# EAGLE board ProPinEZMachBAutoRouteV2c (EAGLE 7.1.0)
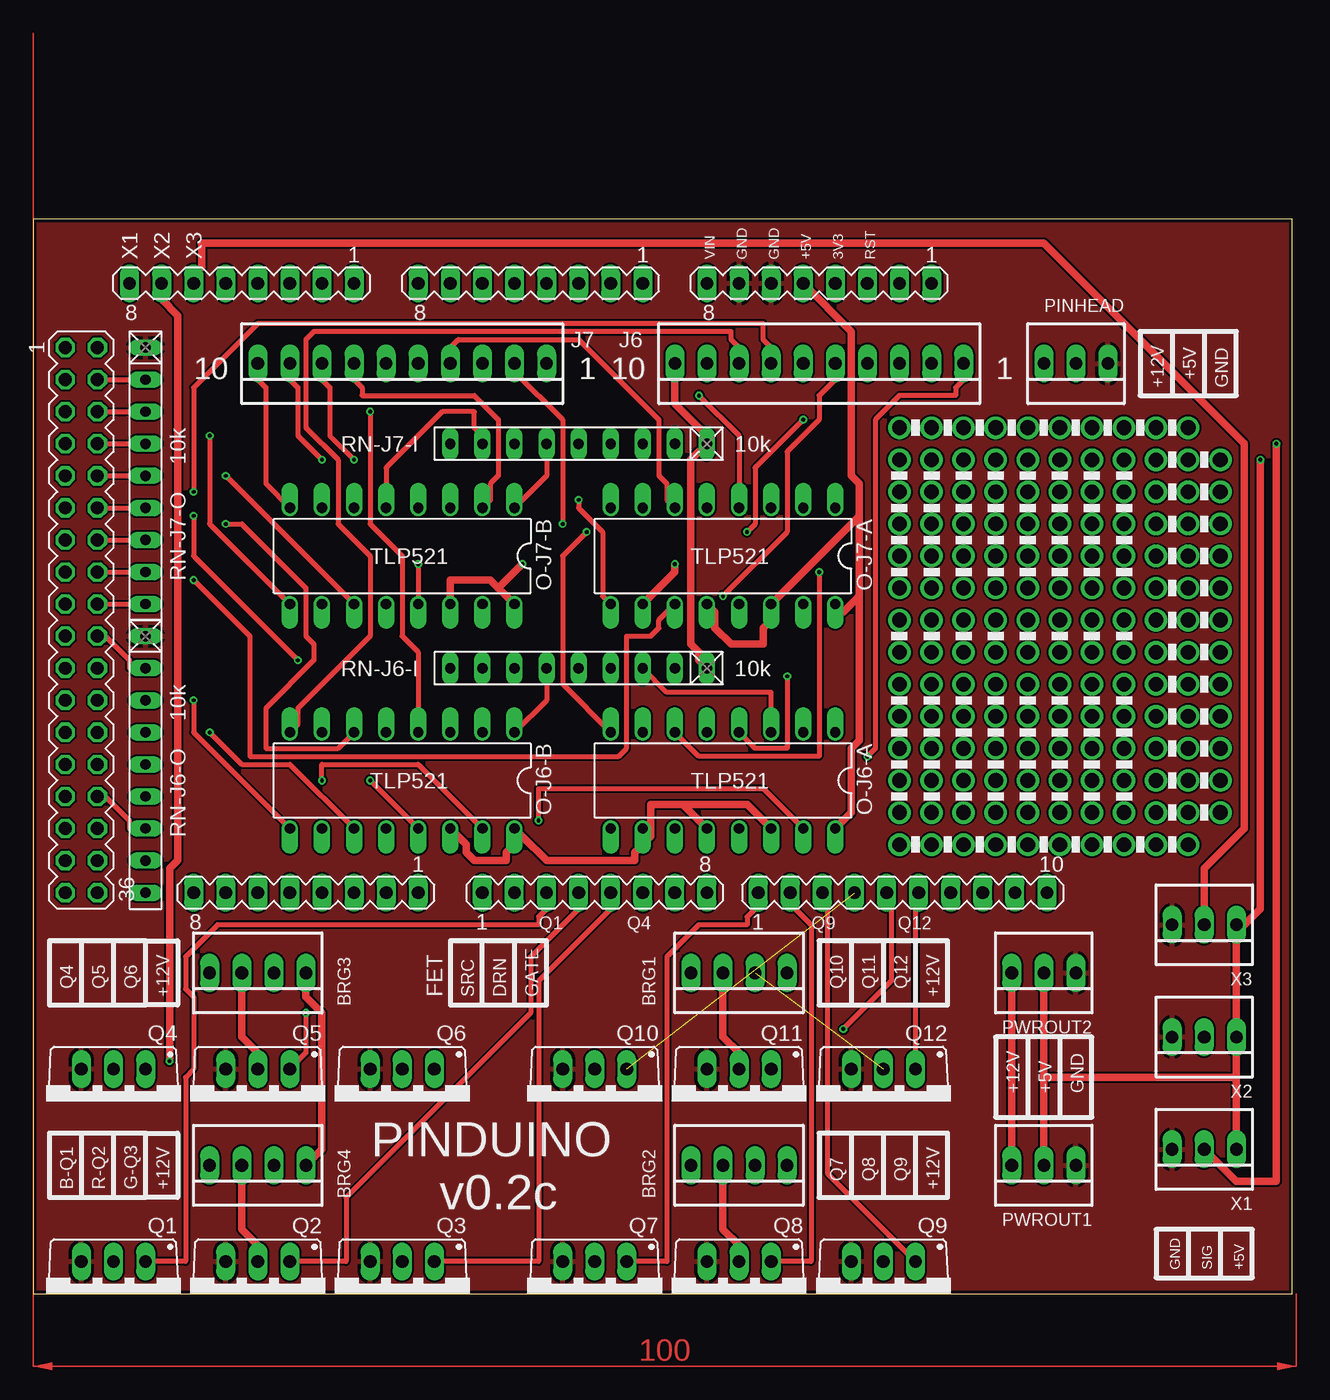
[diagram p0: board, top side]
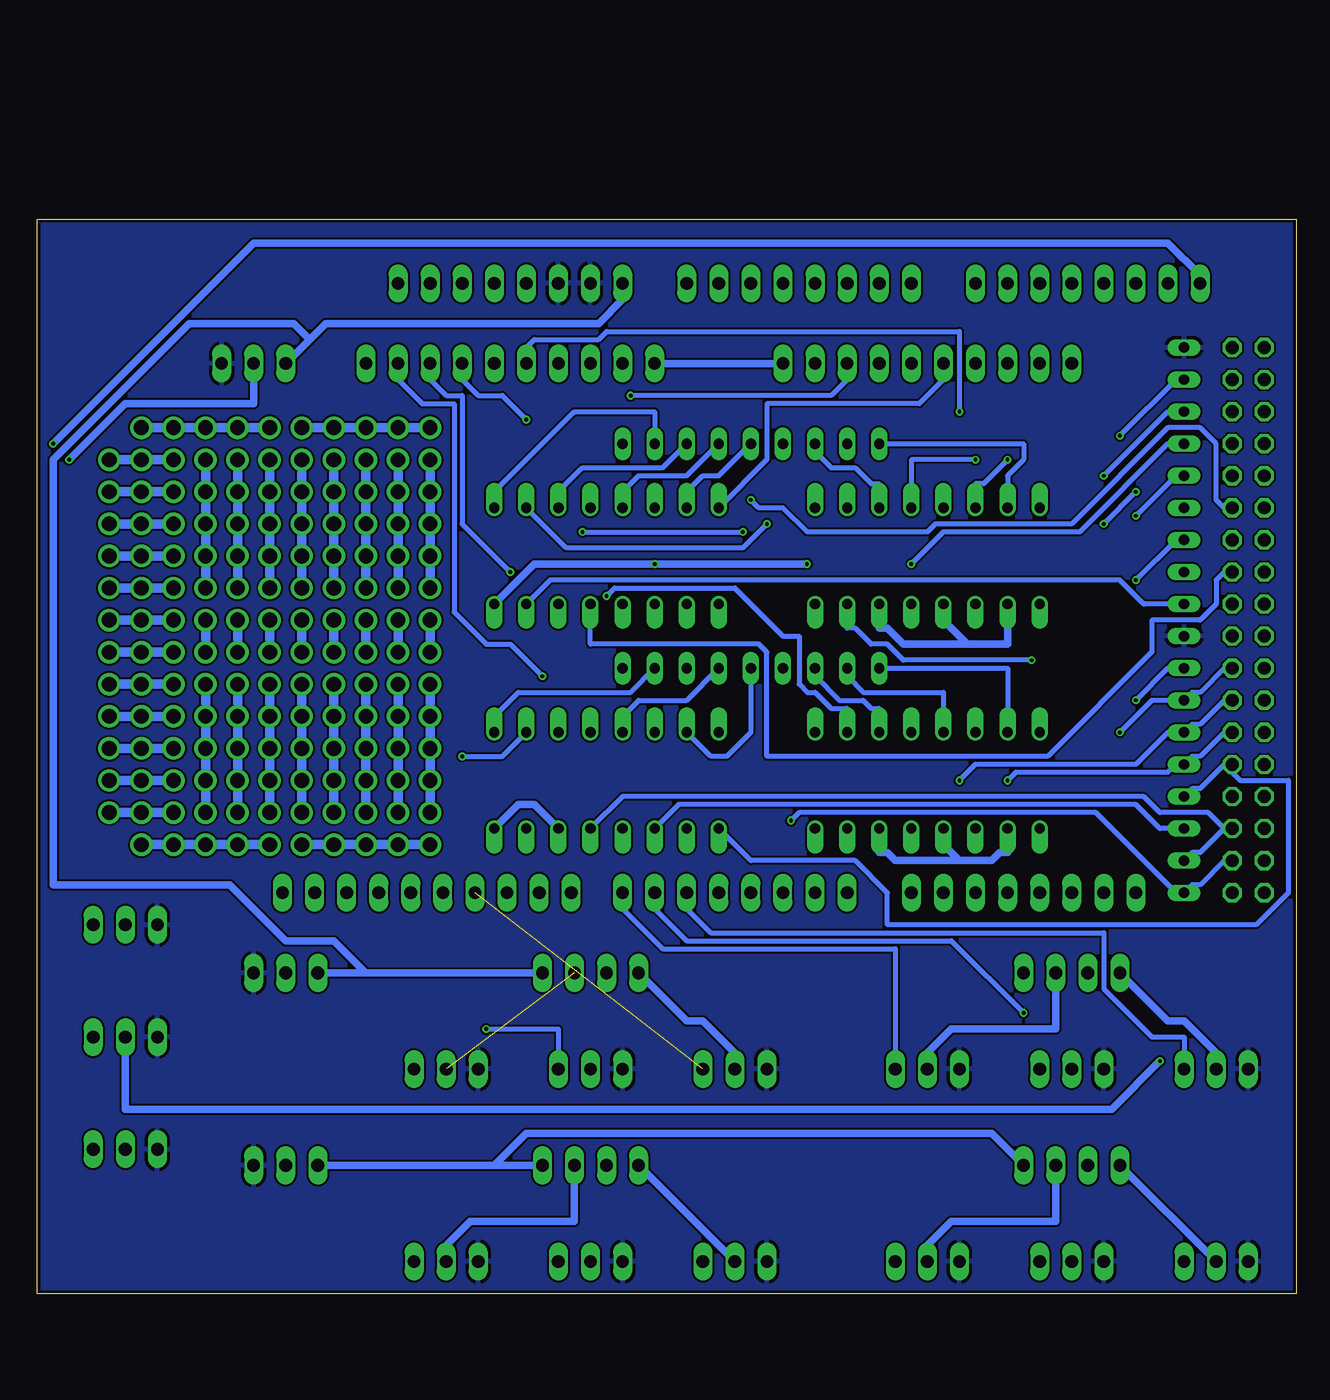
[diagram p1: board, bottom side, seen from below]

Size 99.69 x 85.09 mm. Coordinates in mm from the lower left corner, seen from the top.
Outline: 0,0 99.69,0 99.69,85.09 0,85.09 0,0
Copper layers (1*16): Top 0.035mm / dielectric 1.5mm / Bottom 0.035mm
Design rules "SeeedStudio_2layer_DRU_no_angle_20140221": minimum track width 6mil, minimum drill 12mil, track to track 6mil, track to pad 6mil, pad to pad 6mil, via to via 6mil, smd to smd 0mil, copper to edge 10mil, drill to drill 10mil, minimum pad ring 10mil, minimum via ring 6mil, stop-mask expansion 2mil, vias tented up to drill 100mil, thermal gap 10mil
Net classes: 0 default: width 0.406 mm; 1 Power: width 0.61 mm; 2 GND: width 0.61 mm

## Footprints (pad centres in the part's own frame; a part is rotated, then mirrored left to right if it is on the bottom)
22-23-2041 = drill 1 long: 1 -3.81,0; 2 -1.27,0; 3 1.27,0; 4 3.81,0
22-23-2101 = drill 1 long: 1 -11.43,0; 2 -8.89,0; 3 -6.35,0; 4 -3.81,0; 5 -1.27,0; 6 1.27,0; 7 3.81,0; 8 6.35,0; 9 8.89,0; 10 11.43,0
DIL16 = drill 0.813 offset: 1 -8.89,-3.81; 2 -6.35,-3.81; 3 -3.81,-3.81; 4 -1.27,-3.81; 5 1.27,-3.81; 6 3.81,-3.81; 7 6.35,-3.81; 8 8.89,-3.81; 9 8.89,3.81; 10 6.35,3.81; 11 3.81,3.81; 12 1.27,3.81; 13 -1.27,3.81; 14 -3.81,3.81; 15 -6.35,3.81; 16 -8.89,3.81
PADSTRIP-5H = drill 1.168 pad 1.778: 1 -5.08,0; 2 -2.54,0; 3 0,0; 4 2.54,0; 5 5.08,0
PADSTRIP-5HC = drill 1.168 pad 1.778: 1 -5.08,0; 2 -2.54,0; 3 0,0; 4 2.54,0; 5 5.08,0
22-23-2031 = drill 1 long: 1 -2.54,0; 2 0,0; 3 2.54,0
PADSTRIP-3H = drill 1.168 pad 1.778: 1 0,0; 2 2.54,0; 3 5.08,0
PADSTRIP-2H = drill 1.168 pad 1.778: 1 0,0; 2 2.54,0
TO220BV = drill 1.016 long: D 0,-2.54; G -2.54,-2.54; S 2.54,-2.54
RN-9 = drill 0.813 long: 1 -10.16,0; 2 -7.62,0; 3 -5.08,0; 4 -2.54,0; 5 0,0; 6 2.54,0; 7 5.08,0; 8 7.62,0; 9 10.16,0
MA10-1 = drill 1.016 long: 1 -11.43,0; 2 -8.89,0; 3 -6.35,0; 4 -3.81,0; 5 -1.27,0; 6 1.27,0; 7 3.81,0; 8 6.35,0; 9 8.89,0; 10 11.43,0
MA08-1 = drill 1.016 long: 1 -8.89,0; 2 -6.35,0; 3 -3.81,0; 4 -1.27,0; 5 1.27,0; 6 3.81,0; 7 6.35,0; 8 8.89,0
MA18-2 = drill 1.016 octagon: 1 -21.59,-1.27; 2 -21.59,1.27; 3 -19.05,-1.27; 4 -19.05,1.27; 5 -16.51,-1.27; 6 -16.51,1.27; 7 -13.97,-1.27; 8 -13.97,1.27; 9 -11.43,-1.27; 10 -11.43,1.27; 11 -8.89,-1.27; 12 -8.89,1.27; 13 -6.35,-1.27; 14 -6.35,1.27; 15 -3.81,-1.27; 16 -3.81,1.27; 17 -1.27,-1.27; 18 -1.27,1.27; 19 1.27,-1.27; 20 1.27,1.27; 21 3.81,-1.27; 22 3.81,1.27; 23 6.35,-1.27; 24 6.35,1.27; 25 8.89,-1.27; 26 8.89,1.27; 27 11.43,-1.27; 28 11.43,1.27; 29 13.97,-1.27; 30 13.97,1.27; 31 16.51,-1.27; 32 16.51,1.27; 33 19.05,-1.27; 34 19.05,1.27; 35 21.59,-1.27; 36 21.59,1.27

## Placement (x,y rotation side)
BRG1  22-23-2041  [22-23-2041]  55.88,25.4 180 top
BRG2  22-23-2041  [22-23-2041]  55.88,10.16 180 top
BRG3  22-23-2041  [22-23-2041]  17.78,25.4 180 top
BRG4  22-23-2041  [22-23-2041]  17.78,10.16 180 top
J6  22-23-2101  [22-23-2101]  62.23,73.66 180 top
J7  22-23-2101  [22-23-2101]  29.21,73.66 180 top
O-J6-A  TLP521  [DIL16]  54.61,40.64 180 top
O-J6-B  TLP521  [DIL16]  29.21,40.64 180 top
O-J7-A  TLP521  [DIL16]  54.61,58.42 180 top
O-J7-B  TLP521  [DIL16]  29.21,58.42 180 top
P1  PADSTRIP5-HA  [PADSTRIP-5H]  68.58,60.96 90 top
P2  PADSTRIP5-HA  [PADSTRIP-5H]  71.12,60.96 90 top
P3  PADSTRIP5-HA  [PADSTRIP-5H]  73.66,60.96 90 top
P4  PADSTRIP5-HA  [PADSTRIP-5H]  76.2,60.96 90 top
P5  PADSTRIP5-HA  [PADSTRIP-5H]  78.74,60.96 90 top
P6  PADSTRIP5-HA  [PADSTRIP-5H]  81.28,60.96 90 top
P7  PADSTRIP5-HA  [PADSTRIP-5H]  83.82,60.96 90 top
P8  PADSTRIP5-HA  [PADSTRIP-5H]  86.36,60.96 90 top
P9  PADSTRIP5-HA  [PADSTRIP-5H]  68.58,43.18 90 top
P10  PADSTRIP5-HA  [PADSTRIP-5H]  71.12,43.18 90 top
P11  PADSTRIP5-HA  [PADSTRIP-5H]  73.66,43.18 90 top
P12  PADSTRIP5-HA  [PADSTRIP-5H]  76.2,43.18 90 top
P13  PADSTRIP5-HA  [PADSTRIP-5H]  78.74,43.18 90 top
P14  PADSTRIP5-HA  [PADSTRIP-5H]  81.28,43.18 90 top
P15  PADSTRIP5-HA  [PADSTRIP-5H]  83.82,43.18 90 top
P16  PADSTRIP5-HA  [PADSTRIP-5H]  86.36,43.18 90 top
P17  PADSTRIP5-HB  [PADSTRIP-5HC]  73.66,35.56 0 top
P18  PADSTRIP5-HB  [PADSTRIP-5HC]  86.36,35.56 180 top
P19  PADSTRIP5-HB  [PADSTRIP-5HC]  86.36,68.58 180 top
P20  PADSTRIP5-HB  [PADSTRIP-5HC]  73.66,68.58 0 top
PINHEAD  PINHEAD  [22-23-2031]  82.55,73.66 180 top
PR1  [PADSTRIP-3H]  88.9,60.96 0 top
PR2  [PADSTRIP-3H]  88.9,58.42 0 top
PR3  [PADSTRIP-3H]  88.9,55.88 0 top
PR4  [PADSTRIP-3H]  88.9,53.34 0 top
PR5  [PADSTRIP-3H]  88.9,50.8 0 top
PR6  [PADSTRIP-3H]  88.9,48.26 0 top
PR7  [PADSTRIP-3H]  88.9,45.72 0 top
PR8  [PADSTRIP-3H]  88.9,43.18 0 top
PR9  [PADSTRIP-3H]  88.9,40.64 0 top
PR10  [PADSTRIP-3H]  88.9,38.1 0 top
PR13  [PADSTRIP-2H]  68.58,50.8 90 top
PR14  [PADSTRIP-2H]  71.12,50.8 90 top
PR15  [PADSTRIP-2H]  73.66,50.8 90 top
PR16  [PADSTRIP-2H]  76.2,50.8 90 top
PR17  [PADSTRIP-2H]  78.74,50.8 90 top
PR18  [PADSTRIP-2H]  81.28,50.8 90 top
PR19  [PADSTRIP-2H]  83.82,50.8 90 top
PR20  [PADSTRIP-2H]  86.36,50.8 90 top
PR23  [PADSTRIP-3H]  88.9,63.5 0 top
PR24  [PADSTRIP-3H]  88.9,66.04 0 top
PWROUT1  PWROUT1  [22-23-2031]  80.01,10.16 180 top
PWROUT2  PWROUT2  [22-23-2031]  80.01,25.4 180 top
Q1  [TO220BV]  6.35,0 180 top
Q2  [TO220BV]  17.78,0 180 top
Q3  [TO220BV]  29.21,0 180 top
Q4  [TO220BV]  6.35,15.24 180 top
Q5  [TO220BV]  17.78,15.24 180 top
Q6  [TO220BV]  29.21,15.24 180 top
Q7  [TO220BV]  44.45,0 180 top
Q8  [TO220BV]  55.88,0 180 top
Q9  [TO220BV]  67.31,0 180 top
Q10  [TO220BV]  44.45,15.24 180 top
Q11  [TO220BV]  55.88,15.24 180 top
Q12  [TO220BV]  67.31,15.24 180 top
RN-J6-I  10k  [RN-9]  43.18,49.53 180 top
RN-J6-O  10k  [RN-9]  8.89,41.91 270 top
RN-J7-I  10k  [RN-9]  43.18,67.31 180 top
RN-J7-O  10k  [RN-9]  8.89,64.77 270 top
SV1  [MA10-1]  68.83,31.75 0 top
SV2  [MA08-1]  44.45,31.75 0 top
SV3  [MA08-1]  21.59,31.75 180 top
SV4  [MA08-1]  39.37,80.01 180 top
SV5  [MA08-1]  16.51,80.01 180 top
SV6  [MA08-1]  62.23,80.01 180 top
SV8  [MA18-2]  3.81,53.34 270 top
X1  22-23-2031  [22-23-2031]  92.71,11.43 180 top
X2  22-23-2031  [22-23-2031]  92.71,20.32 180 top
X3  22-23-2031  [22-23-2031]  92.71,29.21 180 top

## Library data of the parts
BRG1-BRG4 = con-molex; MF: MOLEX; MPN: 22-23-2041; OC_FARNELL: 1462920; OC_NEWARK: 38C0355
J6 J7 = con-molex; MF: MOLEX; MPN: 22-23-2101; OC_FARNELL: 1756828; OC_NEWARK: 94C0765
O-J6-A O-J6-B O-J7-B = optocoupler; MPN: TIL 199; OC_FARNELL: 1683370; OC_NEWARK: 05R6483
O-J7-A = optocoupler; MPN: TLP 521; OC_FARNELL: 1683370; OC_NEWARK: 05R6483
P1-P16 PR1-PR10 PR13-PR20 PR23 PR24 = proto; BOM: no; VALSTAT: label
P17-P20 = proto
PINHEAD PWROUT1 PWROUT2 X1-X3 = con-molex; MF: MOLEX; MPN: 22-23-2031; OC_FARNELL: 1462950; OC_NEWARK: 30C0862
Q1-Q12 = transistor-power
RN-J6-I RN-J6-O RN-J7-I RN-J7-O = resistor-net; OC_FARNELL: unknown; OC_NEWARK: unknown
SV1-SV6 SV8 = con-lstb; OC_FARNELL: unknown; OC_NEWARK: unknown

## Nets
ARD+5V [Power]: O-J6-A.10 O-J6-A.12 O-J6-A.14 O-J6-A.16 O-J6-B.10 O-J6-B.12 O-J6-B.14 O-J6-B.16 O-J7-A.10 O-J7-A.12 O-J7-A.14 O-J7-A.16 O-J7-B.10 O-J7-B.12 O-J7-B.14 O-J7-B.16 SV6.5
GND: PINHEAD.1 PWROUT1.1 PWROUT2.1 Q1.S Q2.S Q3.S Q4.S Q5.S Q6.S Q7.S Q8.S Q9.S Q10.S Q11.S Q12.S RN-J6-O.1 RN-J7-O.1 SV6.6 SV6.7 X1.3 X2.3 X3.3
N$1: P17.5 P18.5
N$2: J7.5
N$3: O-J7-A.3 RN-J7-I.3
N$4: O-J7-A.5 RN-J7-I.4
N$5: O-J7-A.7 RN-J7-I.5
N$6: O-J7-B.1 RN-J7-I.6
N$7: O-J7-B.3 RN-J7-I.7
N$8: O-J7-B.5 RN-J7-I.8
N$9: O-J7-A.1 RN-J7-I.2
N$10: J7.2 O-J7-A.2
N$11: J7.3 O-J7-A.4
N$12: J7.4 O-J7-A.6
N$13: J7.6 O-J7-A.8
N$14: J7.7 O-J7-B.2
N$15: J7.8 O-J7-B.4
N$16: J7.9 O-J7-B.6
N$17: J7.10 O-J7-B.8
N$18 [GND]: J6.10 J7.1 RN-J6-I.1 RN-J7-I.1
N$19: J6.1 O-J6-A.2
N$20: J6.2 O-J6-A.4
N$21: J6.3 O-J6-A.6
N$22: J6.4 O-J6-A.8
N$23: J6.5 O-J6-B.2
N$24: O-J7-B.7 RN-J7-I.9
N$25: J6.6 O-J6-B.4
N$26: J6.7 O-J6-B.6
N$27: J6.8 O-J6-B.8
N$28: O-J6-A.1 RN-J6-I.2
N$29: O-J6-A.3 RN-J6-I.3
N$30: O-J6-A.5 RN-J6-I.4
N$31: O-J6-A.7 RN-J6-I.5
N$32: O-J6-B.1 RN-J6-I.6
N$33: O-J6-B.3 RN-J6-I.7
N$34: O-J6-B.5 RN-J6-I.8
N$35: O-J6-B.7 RN-J6-I.9
N$36: O-J7-A.9 RN-J7-O.6 SV8.12
N$37: O-J7-A.11 RN-J7-O.7 SV8.14
N$38: O-J7-A.13 RN-J7-O.8 SV8.16
N$39: O-J7-A.15 RN-J7-O.9 SV8.18
N$40: O-J7-B.9 RN-J7-O.2 SV8.4
N$41: O-J7-B.11 RN-J7-O.3 SV8.6
N$42: O-J7-B.13 RN-J7-O.4 SV8.8
N$43: O-J7-B.15 RN-J7-O.5 SV8.10
N$44: P19.5 P20.5
N$45: Q10.G SV1.4
N$46 [Power]: SV5.8 X1.2
N$47 [Power]: PINHEAD.2 PWROUT1.2 PWROUT2.2 X1.1 X2.1 X3.1
N$48 [Power]: SV5.7 X2.2
N$49 [Power]: SV5.6 X3.2
N$50 [Power]: BRG4.2 Q3.D
N$51 [Power]: BRG3.4 Q4.D
N$52: BRG1.2 Q12.D
N$55: Q1.G SV2.3
N$57 [Power]: BRG3.3 Q5.D
N$58 [Power]: BRG3.2 Q6.D
N$59: O-J6-A.15 RN-J6-O.9 SV8.34
N$60: O-J6-A.13 RN-J6-O.8 SV8.32
N$61: O-J6-A.11 RN-J6-O.7 SV8.30
N$62: O-J6-A.9 RN-J6-O.6 SV8.28
N$63: O-J6-B.15 RN-J6-O.5 SV8.26
N$64: O-J6-B.13 RN-J6-O.4 SV8.24
N$65: O-J6-B.11 RN-J6-O.3 SV8.22
N$66: O-J6-B.9 RN-J6-O.2 SV8.20
N$69: Q2.G SV2.4
N$70: Q3.G SV2.5
N$71: Q4.G SV2.6
N$72: Q5.G SV2.7
N$73 [Power]: BRG2.4 Q7.D
N$74 [Power]: BRG2.3 Q8.D
N$75 [Power]: BRG2.2 Q9.D
N$76 [Power]: BRG1.1 BRG2.1 BRG3.1 BRG4.1 PINHEAD.3 PWROUT1.3 PWROUT2.3 SV6.8
N$77: Q6.G SV2.8
N$78: Q7.G SV1.1
N$79: Q8.G SV1.2
N$80 [Power]: BRG4.4 Q1.D
N$81: Q9.G SV1.3
N$82 [Power]: BRG4.3 Q2.D
N$84: Q11.G SV1.5
N$85 [Power]: BRG1.4 Q10.D
N$86 [Power]: BRG1.3 Q11.D
N$88: Q12.G SV1.6

## Tracks (layer width: path | path; a pad name or v marks a point on that pad's centre or on a via)
ARD+5V  (via drill 0.3)
  Top 0.61: 38.73,36.2 40.64,34.29 47.62,34.29 47.62,34.92 48.26,35.56 | 51.44,38.73 O-J6-A.12 | 51.44,38.73 48.9,38.73 48.9,36.2 48.26,35.56 | 48.26,35.56 O-J6-A.10 | O-J6-A.14 56.52,38.73 51.44,38.73 | O-J6-B.14 34.29,35.56 34.29,34.92 34.92,34.29 37.47,34.29 37.47,34.92 38.73,36.2 | 38.73,36.2 O-J6-B.16 | 36.83,55.88 36.2,56.52 33.02,56.52 O-J7-B.14 | 36.83,55.88 O-J7-B.16 | O-J7-A.12 53.98,53.98 53.98,52.7 55.24,51.44 57.78,51.44 57.78,52.7 58.42,53.34 O-J7-A.14 65.41,61.59 | O-J7-A.10 50.8,57.15 v50.8,57.78 | SV6.5 64.77,76.2 64.77,64.77 65.41,64.14 65.41,61.59 | 65.41,55.24 65.41,61.59 | 65.41,55.24 64.14,53.98 63.5,53.98 O-J7-A.16 | v38.73,57.78 36.83,55.88 | O-J6-A.16 64.77,38.1 64.77,43.18 65.41,43.81 65.41,55.24
  Bottom 0.61: O-J6-B.10 22.86,34.92 23.5,34.92 24.13,34.29 26.67,34.29 | 26.67,34.29 27.94,35.56 O-J6-B.12 | O-J6-B.14 33.02,34.92 32.38,34.92 31.75,34.29 26.67,34.29 | O-J6-A.16 61.59,38.73 60.33,38.73 O-J6-A.14 | O-J7-B.10 22.86,51.44 26.04,51.44 | 26.04,51.44 27.94,53.34 O-J7-B.12 | O-J7-B.14 33.02,52.7 32.38,52.7 31.11,51.44 26.04,51.44 | O-J7-A.16 60.33,57.78 v50.8,57.78 v38.73,57.78
GND
  pour Bottom: 107.95,111.76 -24.13,111.76 -24.13,-2.54 107.95,-2.54
  pour Top: -21.59,118.11 -21.59,-5.08 109.22,-5.08 109.22,118.11
N$1
  Top 0.406: P18.5 P17.5
N$3
  Bottom 0.406: RN-J7-I.3 50.16,65.41 56.52,65.41 58.42,63.5 O-J7-A.3
N$4
  Bottom 0.406: RN-J7-I.4 48.26,64.77 52.07,64.77 53.34,63.5 O-J7-A.5
N$5
  Bottom 0.406: RN-J7-I.5 45.72,64.77 46.99,64.77 48.26,63.5 O-J7-A.7
N$6
  Top 0.406: O-J7-B.1 40.64,64.77 RN-J7-I.6
N$7
  Bottom 0.406: O-J7-B.3 33.02,64.14 33.66,64.14 34.92,65.41 36.83,65.41 38.1,66.67 RN-J7-I.7
N$8
  Top 0.406: O-J7-B.5 27.94,65.41 32.38,69.85 34.92,69.85 34.92,68.58 35.56,67.94 RN-J7-I.8
N$9
  Bottom 0.406: RN-J7-I.2 50.8,69.85 57.15,69.85 63.5,63.5 O-J7-A.1
N$10  (via drill 0.3)
  Top 0.406: v41.91,60.96 41.91,69.22 38.1,73.03 J7.2
  Bottom 0.406: O-J7-A.2 57.78,59.05 43.81,59.05 v41.91,60.96
N$11  (via drill 0.3)
  Top 0.406: O-J7-A.4 55.88,67.94 v52.7,71.12
  Bottom 0.406: v52.7,71.12 36.83,71.12 35.56,72.39 J7.3
N$12
  Top 0.406: O-J7-A.6 50.16,62.87 50.16,64.14 49.53,64.77 49.53,69.22 43.18,75.56 33.66,75.56 33.02,74.93 J7.4
N$13
  Bottom 0.406: O-J7-A.8 41.91,66.04 41.91,70.48 29.84,70.48 27.94,72.39 J7.6
N$14
  Top 0.406: O-J7-B.2 36.2,62.87 36.2,64.14 36.83,64.77 36.83,69.22 34.92,71.12 26.04,71.12 26.04,71.75 25.4,72.39 J7.7
N$15  (via drill 0.3)
  Top 0.406: v25.4,66.04 23.5,67.94 23.5,71.75 22.86,72.39 J7.8
  Bottom 0.406: O-J7-B.4 30.48,66.04 v25.4,66.04
N$16  (via drill 0.3)
  Top 0.406: v22.86,66.04 20.95,67.94 20.95,71.75 20.32,72.39 J7.9
  Bottom 0.406: O-J7-B.6 25.4,64.14 24.77,64.14 v22.86,66.04
N$17
  Top 0.406: O-J7-B.8 18.41,64.14 18.41,71.75 17.78,72.39 J7.10
N$18
  Top 0.61: RN-J6-I.1 52.7,50.16 52.7,50.8 52.07,51.44 52.07,66.04 52.7,66.67 53.34,66.67 RN-J7-I.1 53.34,67.94 50.8,70.48 J6.10
  Bottom 0.61: J6.10 J7.1
N$19  (via drill 0.3)
  Top 0.406: v66.04,42.55 66.67,43.18 66.67,69.22 68.58,71.12 73.03,71.12 73.03,71.75 73.66,72.39 J6.1
  Bottom 0.406: O-J6-A.2 62.87,42.55 v66.04,42.55
N$20  (via drill 0.3)
  Top 0.406: O-J6-A.4 57.15,43.18 59.69,43.18 v59.69,48.9
  Bottom 0.406: v59.69,48.9 62.23,51.44 64.14,51.44 66.67,53.98 66.67,70.48 69.22,70.48 71.12,72.39 J6.2
N$21  (via drill 0.3)
  Top 0.406: O-J6-A.6 52.7,42.55 62.23,42.55 v62.23,57.15
  Bottom 0.406: v62.23,57.15 66.04,60.96 66.04,71.12 67.31,71.12 68.58,72.39 J6.3
N$22  (via drill 0.3)
  Top 0.406: O-J6-A.8 41.91,48.26 41.91,58.42 v43.81,60.33 | v56.52,60.33 57.15,60.96 57.15,65.41 v60.96,69.22
  Bottom 0.406: v56.52,60.33 v43.81,60.33 | v60.96,69.22 62.87,71.12 64.77,71.12 66.04,72.39 J6.4
N$23  (via drill 0.3)
  Top 0.406: v54.61,55.24 59.69,60.33 59.69,66.67 62.23,69.22 62.23,71.12 63.5,72.39 J6.5
  Bottom 0.406: O-J6-B.2 35.56,46.35 36.83,46.35 38.1,47.62 38.73,47.62 39.37,48.26 39.37,52.07 40.64,52.07 44.45,55.88 53.98,55.88 v54.61,55.24
N$24
  Bottom 0.406: O-J7-B.7 22.86,64.77 21.59,66.04 21.59,67.31 RN-J7-I.9
N$25  (via drill 0.3)
  Top 0.406: O-J6-B.4 30.48,50.8 29.21,52.07 29.21,58.42 26.67,60.96 v26.67,69.85
  Bottom 0.406: v26.67,69.85 26.67,76.2 54.61,76.2 55.24,75.56 60.33,75.56 60.96,74.93 J6.6
N$26  (via drill 0.3)
  Top 0.406: O-J6-B.6 24.13,43.18 18.41,43.18 18.41,46.35 22.23,50.16 22.23,51.44 21.59,52.07 21.59,55.88 16.51,60.96 v15.24,60.96 | v12.7,63.5 12.7,71.75 17.78,76.83 57.78,76.83 57.78,75.56 58.42,74.93 J6.7
  Bottom 0.406: v12.7,63.5 v15.24,60.96
N$27
  Top 0.406: O-J6-B.8 20.95,45.09 20.95,46.35 26.67,52.07 26.67,58.42 24.13,60.96 24.13,66.04 21.59,68.58 21.59,75.56 22.23,76.2 55.24,76.2 55.24,75.56 55.88,74.93 J6.8
N$28
  Bottom 0.406: RN-J6-I.2 52.7,47.62 61.59,47.62 63.5,45.72 O-J6-A.1
N$29
  Top 0.406: RN-J6-I.3 50.16,47.62 58.42,47.62 O-J6-A.3
N$30
  Bottom 0.406: RN-J6-I.4 48.26,46.99 52.07,46.99 53.34,45.72 O-J6-A.5
N$31
  Bottom 0.406: O-J6-A.7 46.35,42.55 45.09,42.55 43.18,44.45 RN-J6-I.5
N$32
  Top 0.406: O-J6-B.1 40.64,46.99 RN-J6-I.6
N$33
  Bottom 0.406: O-J6-B.3 33.02,46.35 33.66,46.35 34.29,46.99 36.2,46.99 38.1,48.9 RN-J6-I.7
N$34
  Bottom 0.406: O-J6-B.5 27.94,47.62 34.29,47.62 35.56,48.9 RN-J6-I.8
N$35
  Bottom 0.406: O-J6-B.7 22.86,49.53 RN-J6-I.9
N$36  (via drill 0.3)
  Top 0.406: SV8.12 RN-J7-O.6 | O-J7-A.9 45.09,55.24 45.09,60.33 43.18,62.23 v43.18,62.87
  Bottom 0.406: v43.18,62.87 42.55,62.23 40.64,62.23 38.73,60.33 29.21,60.33 28.57,60.96 17.78,60.96 10.16,68.58 7.62,68.58 6.35,67.31 6.35,62.87 5.71,62.23 SV8.12
N$37  (via drill 0.3)
  Top 0.406: SV8.14 RN-J7-O.7 | O-J7-A.11 49.53,53.34 49.53,52.7 48.9,52.07 46.99,52.07 46.99,43.18 46.35,42.55 17.14,42.55 17.14,52.07 v12.7,56.52
  Bottom 0.406: v12.7,56.52 9.53,59.69 RN-J7-O.7
N$38
  Top 0.406: SV8.16 RN-J7-O.8
  Bottom 0.406: O-J7-A.13 55.88,51.44 42.55,51.44 41.91,50.8 41.91,42.55 19.68,42.55 11.43,50.8 11.43,53.34 7.62,53.34 6.35,54.61 6.35,56.52 5.71,57.15 SV8.16
N$39
  Top 0.406: SV8.18 RN-J7-O.9
  Bottom 0.406: O-J7-A.15 59.05,56.52 13.97,56.52 12.06,54.61 RN-J7-O.9
N$40  (via drill 0.3)
  Top 0.406: SV8.4 RN-J7-O.2 | O-J7-B.9 13.97,60.96 v13.97,67.94
  Bottom 0.406: v13.97,67.94 9.53,72.39 RN-J7-O.2
N$41  (via drill 0.3)
  Top 0.406: SV8.6 RN-J7-O.3 | v15.24,64.77 O-J7-B.11
  Bottom 0.406: v15.24,64.77 10.16,69.85 RN-J7-O.3
N$42  (via drill 0.3)
  Top 0.406: SV8.8 RN-J7-O.4 | v30.48,57.78 O-J7-B.13
  Bottom 0.406: v30.48,57.78 27.94,60.33 17.14,60.33 10.16,67.31 RN-J7-O.4
N$43  (via drill 0.3)
  Top 0.406: SV8.10 RN-J7-O.5 | v20.95,50.16 12.7,58.42 v12.7,61.59
  Bottom 0.406: O-J7-B.15 35.56,52.7 34.92,52.7 33.66,51.44 32.38,51.44 31.11,50.16 v20.95,50.16 | v12.7,61.59 9.53,64.77 RN-J7-O.5
N$44
  Top 0.406: P19.5 P20.5
N$45  (1 unrouted)
N$46  (via drill 0.3)
  Top 0.61: X1.2 95.25,8.89 98.42,8.89 v98.42,67.31
  Bottom 0.61: v98.42,67.31 82.55,83.19 10.16,83.19 7.62,80.64 SV5.8
N$47  (via drill 0.3)
  Top 0.61: PWROUT2.2 80.01,17.14 | 80.01,17.14 PWROUT1.2 | 95.25,17.14 X2.1 95.25,28.57 | 95.25,17.14 X1.1 | v97.16,66.04 97.16,30.48 95.25,28.57 | 95.25,28.57 X3.1 | 95.25,17.14 80.01,17.14
  Bottom 0.61: PINHEAD.2 82.55,70.48 92.71,70.48 v97.16,66.04
N$48  (via drill 0.3)
  Top 0.61: v10.79,18.41 10.79,33.66 11.43,34.29 11.43,77.47 10.16,78.74 SV5.7
  Bottom 0.61: X2.2 92.71,14.61 14.61,14.61 v10.79,18.41
N$49
  Top 0.61: X3.2 92.71,33.66 95.89,36.83 95.89,67.31 80.01,83.19 13.34,83.19 13.34,81.28 12.7,80.64 SV5.6
N$50
  Bottom 0.61: BRG4.2 19.05,5.71 27.3,5.71 29.21,3.81 Q3.D
N$51
  Bottom 0.61: BRG3.4 10.16,21.59 8.89,21.59 6.35,19.05 Q4.D
N$52  (1 unrouted)
N$55
  Top 0.406: Q1.G 12.06,2.54 12.06,17.14 12.7,17.78 12.7,23.5 12.06,24.13 12.06,26.67 14.61,29.21 40.01,29.21 40.01,29.84 40.64,30.48 SV2.3
N$57
  Top 0.61: BRG3.3 16.51,20.32 17.78,19.05 Q5.D
N$58
  Bottom 0.61: BRG3.2 19.05,20.95 27.3,20.95 29.21,19.05 Q6.D
N$59  (via drill 0.3)
  Top 0.406: O-J6-A.15 57.78,40.01 40.01,40.01 v40.01,37.47
  Bottom 0.406: SV8.34 5.71,34.29 7.62,32.38 8.26,32.38 RN-J6-O.9 9.53,31.75 15.88,38.1 39.37,38.1 v40.01,37.47
N$60
  Bottom 0.406: RN-J6-O.8 8.26,34.92 7.62,34.92 5.71,36.83 | O-J6-A.13 53.34,39.37 12.06,39.37 10.79,38.1 6.99,38.1 5.71,36.83 | 5.71,36.83 SV8.32
N$61
  Top 0.406: RN-J6-O.7 7.62,36.83 7.62,37.47 5.71,39.37 SV8.30
  Bottom 0.406: O-J6-A.11 48.9,38.73 12.7,38.73 10.79,36.83 RN-J6-O.7
N$62
  Bottom 0.406: RN-J6-O.6 8.26,40.01 7.62,40.01 5.71,41.91 | O-J6-A.9 43.18,34.29 34.92,34.29 32.38,31.75 32.38,29.21 3.17,29.21 0.64,31.75 0.64,40.64 4.45,40.64 5.71,41.91 | 5.71,41.91 SV8.28
N$63  (via drill 0.3)
  Top 0.406: O-J6-B.15 30.48,41.91 22.86,41.91 v22.86,40.64
  Bottom 0.406: SV8.26 5.71,44.45 7.62,42.55 8.26,42.55 RN-J6-O.5 9.53,41.91 10.16,41.27 22.23,41.27 v22.86,40.64
N$64  (via drill 0.3)
  Top 0.406: v26.67,40.64 O-J6-B.13
  Bottom 0.406: SV8.24 5.71,46.99 7.62,45.09 8.26,45.09 RN-J6-O.4 10.16,44.45 12.7,41.91 25.4,41.91 v26.67,40.64
N$65  (via drill 0.3)
  Top 0.406: O-J6-B.11 20.32,41.91 16.51,41.91 v13.97,44.45
  Bottom 0.406: SV8.22 5.71,49.53 7.62,47.62 8.26,47.62 RN-J6-O.3 11.43,46.99 v13.97,44.45
N$66  (via drill 0.3)
  Top 0.406: RN-J6-O.2 7.62,49.53 7.62,50.16 5.71,52.07 SV8.20 | O-J6-B.9 12.7,44.45 v12.7,46.99
  Bottom 0.406: v12.7,46.99 10.16,49.53 RN-J6-O.2
N$69
  Top 0.406: Q2.G 24.77,2.54 24.77,7.62 39.37,22.23 39.37,26.67 43.18,30.48 SV2.4
N$70
  Top 0.406: Q3.G 40.01,2.54 40.01,24.77 45.72,30.48 SV2.5
N$71
  Bottom 0.406: Q4.G 8.89,20.32 11.43,20.32 15.24,24.13 15.24,28.57 46.35,28.57 48.26,30.48 SV2.6
N$72  (via drill 0.3)
  Top 0.406: Q5.G 21.59,19.05 v21.59,22.23
  Bottom 0.406: v21.59,22.23 27.3,27.94 48.26,27.94 50.8,30.48 SV2.7
N$73
  Bottom 0.61: Q7.D BRG2.4
N$74
  Top 0.61: BRG2.3 54.61,5.08 55.88,3.81 Q8.D
N$75
  Bottom 0.61: BRG2.2 57.15,5.71 65.41,5.71 67.31,3.81 Q9.D
N$76
  Top 0.61: BRG4.1 22.86,11.43 22.86,22.23 21.59,23.5 BRG3.1 | PWROUT1.3 PWROUT2.3
  Bottom 0.61: 78.11,75.56 76.83,76.83 55.24,76.83 53.34,78.74 SV6.8 | 78.11,75.56 PINHEAD.3 | PWROUT2.3 73.66,25.4 | 73.66,25.4 BRG1.1 | PWROUT1.3 63.5,10.16 | 63.5,10.16 BRG2.1 | BRG4.1 24.13,12.7 60.96,12.7 63.5,10.16 | 78.11,75.56 79.38,76.83 87.63,76.83 98.42,66.04 98.42,32.38 84.45,32.38 80.01,27.94 76.2,27.94 73.66,25.4
N$77
  Bottom 0.406: Q6.G 31.75,27.3 50.16,27.3 53.34,30.48 SV2.8
N$78
  Top 0.406: Q7.G 50.16,2.54 50.16,26.67 52.7,29.21 56.52,29.21 56.52,29.84 57.15,30.48 57.15,31.75 SV1.1
N$79
  Top 0.406: Q8.G 61.59,2.54 61.59,29.21 60.33,30.48 60.33,31.75 SV1.2
N$80
  Bottom 0.61: Q1.D BRG4.4
N$81
  Top 0.406: Q9.G 62.87,9.53 62.87,31.75 SV1.3
N$82
  Top 0.61: BRG4.3 16.51,5.08 17.78,3.81 Q2.D
N$84  (via drill 0.3)
  Top 0.406: v64.14,20.95 67.94,24.77 67.94,31.75 SV1.5
  Bottom 0.406: Q11.G 58.42,20.95 v64.14,20.95
N$85
  Bottom 0.61: BRG1.4 48.26,21.59 46.99,21.59 44.45,19.05 Q10.D
N$86
  Top 0.61: BRG1.3 54.61,20.32 55.88,19.05 Q11.D
N$88
  Top 0.406: Q12.G 69.85,31.75 SV1.6
(copper drawn outside any net)
  shapes: Top area x3

## Text on the board
tPlace: X1 | X2 | X3 | VIN | GND | GND | +5V | 3V3 | RST | 10 | 1 | 10 | 1 | +12V | +5V | GND | Q1 | Q4 | Q9 | Q12 | Q4 | Q5 | Q6 | Q10 | Q11 | Q12 | +12V | FET | SRC | DRN | GATE | +12V | +12V | +5V | GND | Q7 | Q8 | Q9 | B-Q1 | R-Q2 | G-Q3 | +12V | +12V | GND | SIG | +5V
tNames: PINDUINO / v0.2c
tValues: by: Professor Pinball / TWS/EHL 2015